# EAGLE board CAN_BUS_Interface_v2 (EAGLE 4.11)
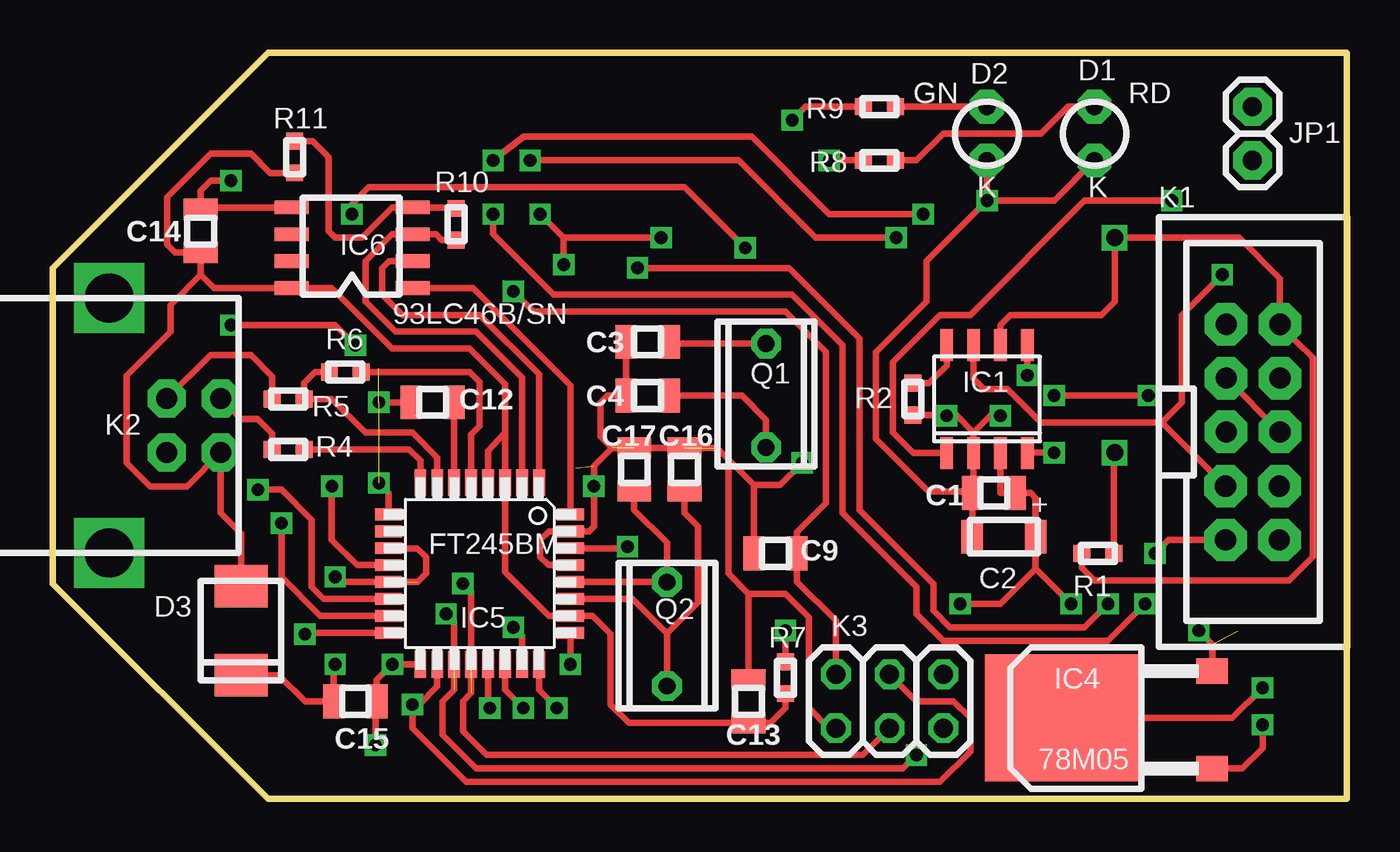
[diagram p0: board, top side]
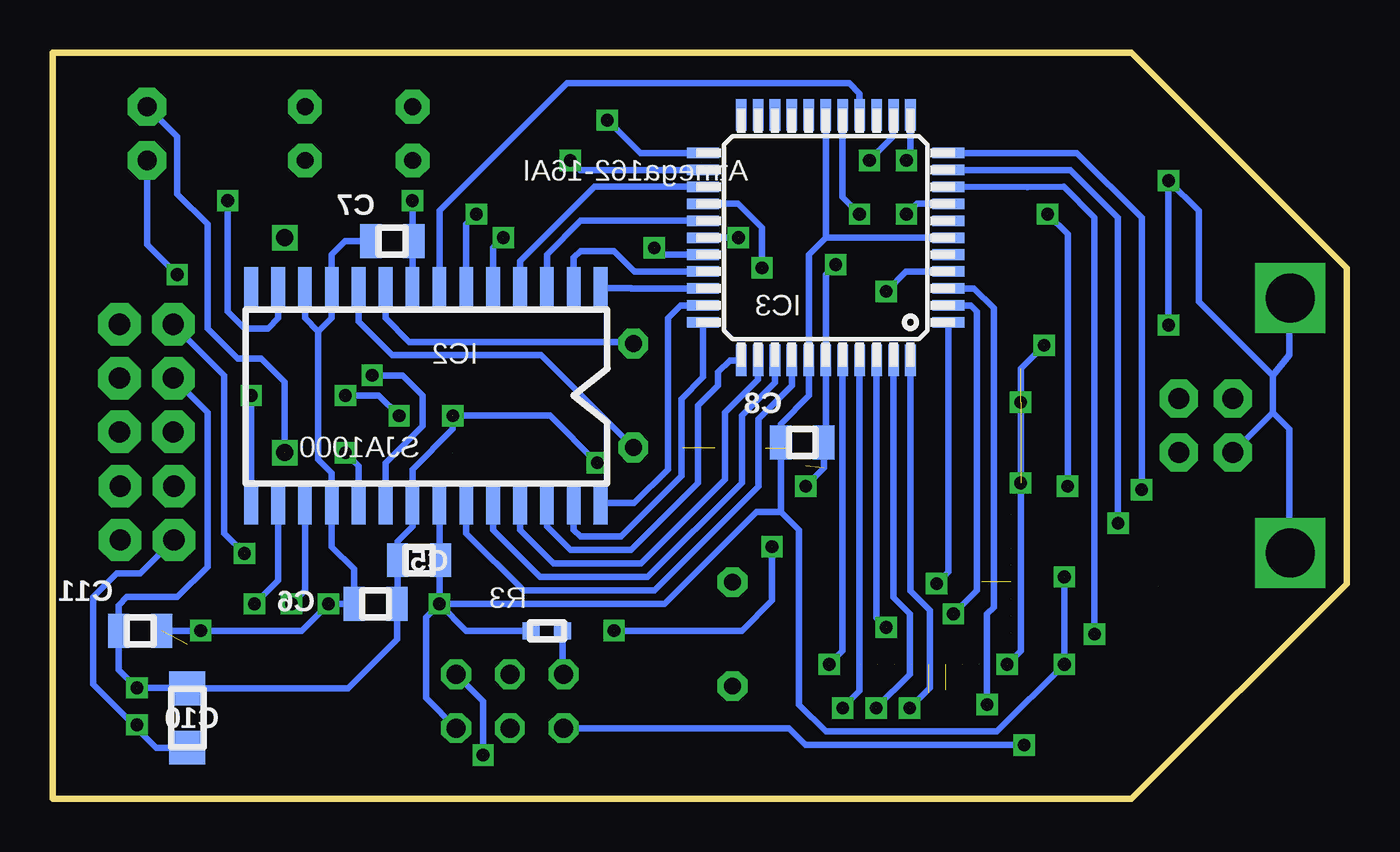
[diagram p1: board, bottom side, seen from below]

Size 61.12 x 35.24 mm. Coordinates in mm from the lower left corner, seen from the top.
Outline: 61.12,0 10.16,0 0,10.16 0,25.08 10.16,35.24 61.12,35.24 61.12,0
Copper layers (1*16): Top 0.035mm / dielectric 1.5mm / Bottom 0.035mm
Design rules "default": minimum track width 10mil, minimum drill 24mil, track to track 8mil, track to pad 8mil, pad to pad 8mil, via to via 8mil, smd to smd 8mil, copper to edge 40mil, drill to drill 8mil, minimum pad ring 10mil, minimum via ring 8mil, stop-mask expansion 4mil, vias tented up to drill 0mil, thermal gap 10mil

## Footprints (pad centres in the part's own frame; a part is rotated, then mirrored left to right if it is on the bottom)
C1 = smd 1 x 1.6: 1 -1.016,0; 2 1.016,0
C2 = smd 1 x 1.6: 1 1.5,0; 2 -1.5,0
C3 = smd 1 x 1.6: 1 1.016,0; 2 -1.016,0
C4 = smd 1 x 1.6: 1 1.016,0; 2 -1.016,0
C5 = smd 1 x 1.6 bottom: 1 -1.016,0; 2 1.016,0
C6 = smd 1 x 1.6 bottom: 1 1.016,0; 2 -1.016,0
C7 = smd 1 x 1.6 bottom: 1 1.016,0; 2 -1.016,0
C8 = smd 1 x 1.6 bottom: 1 1.016,0; 2 -1.016,0
C9 = smd 1 x 1.6: 1 1.016,0; 2 -1.016,0
C10 = smd 1.702 x 1.6 bottom: 1 0,-1.397; 2 0,1.397
C11 = smd 1 x 1.6 bottom: 1 -1.016,0; 2 1.016,0
C12 = smd 1 x 1.6: 1 1.016,0; 2 -1.016,0
C13 = smd 1.6 x 1: 1 0,-1.016; 2 0,1.016
C14 = smd 1.6 x 1: 1 0,1.016; 2 0,-1.016
C15 = smd 1 x 1.6: 1 1.016,0; 2 -1.016,0
C16 = smd 1.6 x 1: 1 0,-1.016; 2 0,1.016
C17 = smd 1.6 x 1: 1 0,-1.016; 2 0,1.016
D1 = drill 0.8 pad 1.6 octagon: 1 0,1.27; 2 0,-1.27
D2 = drill 0.8 pad 1.6 octagon: 1 0,1.27; 2 0,-1.27
D3 = smd 2.5 x 2: 1 0,2.1; 2 0,-2.1
IC1 = smd 0.6 x 1.5: 1 -1.905,-2.55; 2 -0.635,-2.55; 3 0.635,-2.55; 4 1.905,-2.55; 5 1.905,2.55; 6 0.635,2.55; 7 -0.635,2.55; 8 -1.905,2.55
IC2 = smd 0.65 x 2 bottom: 1 0,0; 2 1.27,0; 3 2.54,0; 4 3.81,0; 5 5.08,0; 6 6.35,0; 7 7.62,0; 8 8.89,0; 9 10.16,0; 10 11.43,0; 11 12.7,0; 12 13.97,0; 13 15.24,0; 14 16.51,0; 15 16.51,-10.16; 16 15.24,-10.16; 17 13.97,-10.16; 18 12.7,-10.16; 19 11.43,-10.16; 20 10.16,-10.16; 21 8.89,-10.16; 22 7.62,-10.16; 23 6.35,-10.16; 24 5.08,-10.16; 25 3.81,-10.16; 26 2.54,-10.16; 27 1.27,-10.16; 28 0,-10.16
IC3 = smd 1.5 x 0.5 bottom: 1 -5.8,-4; 2 -5.8,-3.2; 3 -5.8,-2.4; 4 -5.8,-1.6; 5 -5.8,-0.8; 6 -5.8,0; 7 -5.8,0.8; 8 -5.8,1.6; 9 -5.8,2.4; 10 -5.8,3.2; 11 -5.8,4; 23 5.8,4; 24 5.8,3.2; 25 5.8,2.4; 26 5.8,1.6; 27 5.8,0.8; 28 5.8,0; 29 5.8,-0.8; 30 5.8,-1.6; 31 5.8,-2.4; 32 5.8,-3.2; 33 5.8,-4 | smd 0.5 x 1.5 bottom: 12 -4,5.8; 13 -3.2,5.8; 14 -2.4,5.8; 15 -1.6,5.8; 16 -0.8,5.8; 17 0,5.8; 18 0.8,5.8; 19 1.6,5.8; 20 2.4,5.8; 21 3.2,5.8; 22 4,5.8; 34 4,-5.8; 35 3.2,-5.8; 36 2.4,-5.8; 37 1.6,-5.8; 38 0.8,-5.8; 39 0,-5.8; 40 -0.8,-5.8; 41 -1.6,-5.8; 42 -2.4,-5.8; 43 -3.2,-5.8; 44 -4,-5.8
IC4 = smd 1.5 x 1.2: 1 5.239,-2.381; 3 5.239,2.222 | smd 7.5 x 6: 4 -1.746,0
IC5 = smd 0.559 x 1.27: 1 2.8,4.293; 2 2,4.293; 3 1.2,4.293; 4 0.4,4.293; 5 -0.4,4.293; 6 -1.2,4.293; 7 -2,4.293; 8 -2.8,4.293; 17 -2.8,-4.293; 18 -2,-4.293; 19 -1.2,-4.293; 20 -0.4,-4.293; 21 0.4,-4.293; 22 1.2,-4.293; 23 2,-4.293; 24 2.8,-4.293 | smd 1.27 x 0.559: 9 -4.293,2.8; 10 -4.293,2; 11 -4.293,1.2; 12 -4.293,0.4; 13 -4.293,-0.4; 14 -4.293,-1.2; 15 -4.293,-2; 16 -4.293,-2.8; 25 4.293,-2.8; 26 4.293,-2; 27 4.293,-1.2; 28 4.293,-0.4; 29 4.293,0.4; 30 4.293,1.2; 31 4.293,2; 32 4.293,2.8
IC6 = smd 1.6 x 0.65: 1 0,0; 2 0,1.27; 3 0,2.54; 4 0,3.81; 5 -5.715,3.81; 6 -5.715,2.54; 7 -5.715,1.27; 8 -5.715,0
JP1 = drill 0.9 pad 1.8 octagon: 1 0,0; 2 0,2.54
K1 = drill 1 pad 2 octagon: 1 -1.241,5.109; 2 1.299,5.109; 3 -1.241,2.569; 4 1.299,2.569; 5 -1.241,0.029; 6 1.299,0.029; 7 -1.27,-2.54; 8 1.27,-2.54; 9 -1.27,-5.08; 10 1.27,-5.08
K2 = drill 1 pad 1.8 octagon: 1 9.19,-0.94; 2 9.19,1.6; 3 6.65,1.6; 4 6.65,-0.94
K3 = drill 0.9 pad 1.4 octagon: 1 0,0; 2 0,-2.54; 3 -2.54,0; 4 -2.54,-2.54; 5 -5.08,0; 6 -5.08,-2.54
Q1 = drill 0.8 pad 1.4 octagon: 1 0.039,2.46; 2 0.039,-2.453
Q2 = drill 0.8 pad 1.4 octagon: 1 -0.039,-2.46; 2 -0.039,2.453
R1 = smd 0.8 x 0.8: 1 -0.75,0; 2 0.75,0
R2 = smd 0.8 x 0.8: 1 0,-0.75; 2 0,0.75
R3 = smd 0.8 x 0.8 bottom: 1 0.75,0; 2 -0.75,0
R4 = smd 0.8 x 0.8: 1 -0.75,0; 2 0.75,0
R5 = smd 0.8 x 0.8: 1 -0.75,0; 2 0.75,0
R6 = smd 0.8 x 0.8: 1 -0.75,0; 2 0.75,0
R7 = smd 0.8 x 0.8: 1 0,-0.75; 2 0,0.75
R8 = smd 0.8 x 0.8: 1 -0.75,0; 2 0.75,0
R9 = smd 0.8 x 0.8: 1 -0.75,0; 2 0.75,0
R10 = smd 0.8 x 0.8: 1 0,0.75; 2 0,-0.75
R11 = smd 0.8 x 0.8: 1 0,0.75; 2 0,-0.75

## Placement (x,y rotation side)
C1  100n  [C1]  44.45,14.45 0 top
C2  1uF/5V  [C2]  44.93,12.38 0 top
C3  15p  [C3]  28.1,21.59 0 top
C4  15p  [C4]  28.1,19.05 0 top
C5  100n  [C5]  43.81,11.27 0 top
C6  100n  [C6]  45.88,9.21 0 top
C7  100n  [C7]  45.09,26.35 0 top
C8  100n  [C8]  25.72,16.83 0 top
C9  10n  [C9]  34.13,11.59 0 top
C10  10u  [C10]  54.77,3.81 0 top
C11  100n  [C11]  56.99,7.94 0 top
C12  33n  [C12]  17.94,18.73 0 top
C13  100n  [C13]  32.86,4.6 0 top
C14  100n  [C14]  6.99,26.83 0 top
C15  100n  [C15]  14.29,4.6 0 top
C16  27p  [C16]  29.84,15.56 0 top
C17  27p  [C17]  27.46,15.56 0 top
D1  LED_Red  [D1]  49.21,31.43 0 top
D2  LED_Green  [D2]  44.13,31.43 0 top
D3  MBRS130LTR  [D3]  8.89,7.94 0 top
IC1  PCA82C250  [IC1]  44.13,18.89 0 top
IC2  SJA1000  [IC2]  35.24,24.13 0 top
IC3  Atmega162-16AI  [IC3]  24.61,26.51 0 top
IC4  78M05  [IC4]  49.53,3.81 0 top
IC5  FT245BM  [IC5]  20.16,10.64 0 top
IC6  93LC46B/SN  [IC6]  16.99,24.13 0 top
JP1  K1x2  [JP1]  56.67,30.16 0 top
K1  CAN BUS  [K1]  56.67,17.3 0 top
K2  USB-B  [K2]  -1.27,17.3 0 top
K3  ISP  [K3]  42.07,5.87 0 top
Q1  16MHZ  [Q1]  33.66,19.05 0 top
Q2  6MHZ  [Q2]  29.05,7.78 0 top
R1  121  [R1]  49.37,11.59 0 top
R2  39k2  [R2]  40.64,18.89 0 top
R3  10k  [R3]  37.78,7.94 0 top
R4  27  [R4]  11.11,16.51 0 top
R5  27  [R5]  11.11,18.89 0 top
R6  1k5  [R6]  13.81,20.16 0 top
R7  470  [R7]  34.61,5.71 0 top
R8  520  [R8]  39.05,30.16 0 top
R9  520  [R9]  39.05,32.7 0 top
R10  2k2  [R10]  19.05,27.15 0 top
R11  10k  [R11]  11.43,30.32 0 top

## Library data of the parts
C1-C17 D1-D3 IC1-IC6 JP1 K1-K3 Q1 Q2 R1-R11 = CAN_BUS_Interface_v2

## Nets
1: IC6.4 R10.1 R11.1
2: JP1.2 R1.2
3V3OUT: C12.1 IC5.6
+5V: C1.2 C2.1 C5.1 C6.1 C7.1 C8.1 C11.1 C15.2 D3.2 IC1.3 IC2.11 IC2.12 IC2.18 IC2.22 IC3.6 IC3.17 IC3.38 IC4.3 IC5.11 IC5.13 K3.2 R3.1
AVR_CLK: IC2.7 IC3.15
CAN_ALE: IC2.3 IC3.27
CAN_CS: IC2.4 IC3.25
CAN_INT: IC2.16 IC3.8
CAN_RD: IC2.5 IC3.13
CAN_RST: IC2.17 IC3.26
CAN_VCC: C10.1 IC4.1 K1.1 K1.9
CAN_WR: IC2.6 IC3.12
CANH: IC1.7 JP1.1 K1.7
CANL: IC1.6 K1.2 R1.1
D0: IC3.40 IC5.25
D1: IC3.41 IC5.24
D2: IC3.42 IC5.23
D3: IC3.43 IC5.22
D4: IC3.44 IC5.21
D5: IC3.1 IC5.20 K3.4
D6: IC3.2 IC5.19 K3.1
D7: IC3.3 IC5.18 K3.3
DATA+: K2.3 R5.1
DATA-: K2.2 R4.1
EECS: IC5.32 IC6.1
EEDATA: IC5.2 IC6.3 R10.2
EESK: IC5.1 IC6.2
GND: C1.1 C2.2 C3.2 C4.2 C5.2 C6.2 C7.2 C8.2 C9.2 C10.2 C11.2 C12.2 C13.2 C14.1 C15.1 C16.2 C17.2 D1.2 D2.2 IC1.2 IC2.8 IC2.15 IC2.21 IC3.16 IC3.28 IC3.39 IC4.4 IC5.9 IC5.17 IC5.29 IC5.31 IC6.5 K1.3 K1.6 K2.4 K3.6 R2.1
LED1: IC3.23 R9.1
LED2: IC3.24 R8.1
PA0/AD0/PCINT0: IC2.23 IC3.37
PA1/AD1/PCINT1: IC2.24 IC3.36
PA2/AD2/PCINT2: IC2.25 IC3.35
PA3/AD3/PCINT3: IC2.26 IC3.34
PA4/AD4/PCINT4: IC2.27 IC3.33
PA5/AD5/PCINT5: IC2.28 IC3.32
PA6/AD6/PCINT6: IC2.1 IC3.31
PA7/AD7/PCINT7: IC2.2 IC3.30
RESET: C9.1 IC3.4 K3.5 R3.2
RS: IC1.8 R2.2
RSTOUT#: IC5.5 R6.2
RX0: IC1.4 IC2.19
RX1: IC1.5 IC2.20
SIG$49: IC5.30 R7.2
SIG$52: D2.1 R9.2
SIG$53: D1.1 R8.2
TX0: IC1.1 IC2.13
USB_RD: IC3.9 IC5.16
USB_RXF: IC3.29 IC5.12
USB_TXE: IC3.11 IC5.14
USB_VCC: C13.1 C14.2 D3.1 IC5.3 IC5.4 IC5.26 IC6.8 K2.1 R7.1 R11.2
USB_WR: IC3.10 IC5.15
USBDM: IC5.8 R4.2
USBDP: IC5.7 R5.2 R6.1
XTAL1: C3.1 IC2.9 Q1.1
XTAL2: C4.1 IC2.10 Q1.2
XTIN: C16.1 IC5.27 Q2.1
XTOUT: C17.1 IC5.28 Q2.2

## Tracks (layer width: path | path; a pad name or v marks a point on that pad's centre or on a via)
1
  Top 0.3: R10.1 19.01,27.94 IC6.4 16.03,27.94 14.61,26.51 13.34,26.51 13.02,26.83 13.02,30.32 12.27,31.07 R11.1
2  (via drill 0.8)  (1 unrouted)
  Top 0.3: v50.16,16.35 50.11,16.3 50.11,13.79 R1.2
  Bottom 0.3: v50.16,16.35 50.16,19.68 51.28,20.8 52.39,20.8 53.82,22.23 53.82,27.15 55.24,28.57 55.24,31.27 JP1.2
3V3OUT
  Top 0.3: IC5.6 C12.1
+5V  (via drill 0.6)  (7 unrouted)
  Top 0.3: IC1.3 44.77,14.45 C1.2 46.2,14.45 46.43,14.22 C2.1 46.43,10.88 | v42.86,9.21 44.77,9.21 46.43,10.87 46.43,10.88 | 46.43,10.88 v48.1,9.21 | v13.34,10.48 13.58,10.24 17.22,10.24 17.62,10.64 17.62,11.43 17.21,11.84 IC5.11 | v13.34,6.35 13.27,6.29 C15.2 11.91,4.6 10.67,5.84 D3.2 | IC4.3 54.77,7.3 v54.13,7.94
  Bottom 0.3: 48.58,22.07 48.58,16.03 47.94,15.4 IC2.18 47.94,11.91 46.9,10.86 C6.1 v48.1,9.21 49.37,7.94 v54.13,7.94 C11.1 | 48.58,22.07 47.94,22.7 IC2.11 47.94,25.72 47.31,26.35 C7.1 | 48.58,22.07 49.21,22.7 IC2.12 | 42.86,11.34 IC2.22 | v42.86,9.21 42.86,11.34 | 42.86,11.34 C5.1 | 24.61,26.51 IC3.6 | 24.61,26.51 IC3.17 | 24.61,26.51 25.4,25.72 IC3.38 25.41,19.04 26.73,17.72 C8.1 26.73,13.56 | v42.86,9.21 32.23,9.21 27.88,13.56 26.73,13.56 | 26.73,13.56 25.88,12.7 25.88,4.45 24.61,3.17 16.51,3.17 v13.34,6.35 v13.34,10.48 | R3.1 41.59,7.94 v42.86,9.21 | v42.86,9.21 43.5,8.57 43.5,4.76 K3.2
AVR_CLK
  Bottom 0.3: IC3.15 23.01,33.33 23.5,33.81 36.83,33.81 42.86,27.78 IC2.7
CAN_ALE
  Bottom 0.3: IC2.3 37.78,25.72 36.19,27.31 IC3.27
CAN_CS
  Bottom 0.3: IC2.4 39.05,25.4 35.54,28.91 IC3.25
CAN_INT  (via drill 0.6)  (2 unrouted)
  Top 0.3: v51.59,9.21 49.85,7.46 42.07,7.46 40.8,8.73 40.8,10 37.31,13.49 37.31,21.43 34.92,23.81 23.65,23.81 20.8,26.67 v20.8,27.62
  Bottom 0.3: IC2.16 50.48,10.32 v51.59,9.21 | IC3.8 20.31,28.11 v20.8,27.62
CAN_RD  (via drill 0.6)  (2 unrouted)
  Top 0.3: v22.54,30.16 32.38,30.16 36.04,26.51 v39.85,26.51
  Bottom 0.3: IC2.5 40.32,26.04 v39.85,26.51 | IC3.13 21.43,31.27 v22.54,30.16
CAN_RST  (via drill 0.6)  (2 unrouted)
  Top 0.3: v49.85,9.21 48.74,8.1 42.39,8.1 41.59,8.89 41.59,10.16 38.1,13.65 38.1,21.75 34.77,25.08 v27.62,25.08
  Bottom 0.3: IC3.26 28.75,28.11 27.62,26.99 v27.62,25.08 | IC2.17 49.21,9.84 v49.85,9.21
CAN_VCC  (via drill 0.6)  (2 unrouted)
  Top 0.3: v52.07,11.59 52.7,12.22 K1.9 | v57.15,3.49 57.15,2.38 56.2,1.43 IC4.1
  Bottom 0.3: C10.1 56.23,2.41 57.15,3.33 v57.15,3.49 57.31,3.49 59.21,5.4 59.21,9.53 58.1,10.64 56.99,10.64 K1.9 | K1.1 53.02,20 53.02,12.54 v52.07,11.59
CAN_WR  (via drill 0.6)  (2 unrouted)
  Top 0.3: v20.8,30.16 22.23,31.27 33.02,31.27 36.67,27.62 v41.12,27.62
  Bottom 0.3: IC2.6 41.59,27.15 v41.12,27.62 | IC3.12 20.61,30.35 v20.8,30.16
CANH  (via drill 0.6)  (1 unrouted)
  Top 0.3: IC1.7 43.5,19.84 43.97,19.37 45.09,19.37 46.67,17.78 52.39,17.78 | 52.39,17.78 K1.7 | 52.39,17.78 53.34,18.73 53.34,22.86 v55.24,24.77
  Bottom 0.3: v55.24,24.77 56.67,26.19 JP1.1
CANL  (via drill 0.8)
  Top 0.3: R1.1 48.62,10.91 49.21,10.32 58.42,10.32 59.53,11.43 59.53,20.86 57.97,22.35 K1.2 57.97,24.58 56.04,26.51 v50.16,26.51 50.16,23.5 49.53,22.86 45.24,22.86 44.77,22.38 IC1.6
D0  (via drill 0.6)  (1 unrouted)
  Top 0.3: IC5.25 v24.45,6.36 v24.45,6.35
  Bottom 0.3: IC3.40 23.81,6.99 v24.45,6.35
D1  (via drill 0.6)  (2 unrouted)
  Top 0.3: v23.81,4.29 22.96,5.14 IC5.24
  Bottom 0.3: IC3.41 23.01,5.09 v23.81,4.29
D2  (via drill 0.6)  (2 unrouted)
  Top 0.3: v21.75,8.1 22.16,7.68 IC5.23
  Bottom 0.3: IC3.42 22.21,8.55 v21.75,8.1
D3  (via drill 0.6)  (2 unrouted)
  Top 0.3: IC5.22 21.36,5.15 v22.23,4.29
  Bottom 0.3: IC3.43 21.41,9.5 20.64,8.73 20.64,5.87 v22.23,4.29
D4  (via drill 0.6)  (2 unrouted)
  Top 0.3: IC5.21 20.56,4.53 v20.64,4.29
  Bottom 0.3: IC3.44 20.61,9.81 19.68,8.89 19.68,5.24 v20.64,4.29
D5  (via drill 0.6)  (2 unrouted)
  Top 0.3: v19.37,10.16 19.76,9.77 19.76,5 19.37,4.6 19.37,3.17 20.48,2.06 38.26,2.06 K3.4
  Bottom 0.3: IC3.1 18.81,10.72 v19.37,10.16
D6  (via drill 0.6)  (3 unrouted)
  Top 0.3: v18.57,8.73 18.96,8.34 18.96,5.15 18.41,4.6 18.41,3.02 20,1.43 40.16,1.43 v40.8,2.06
  Bottom 0.3: IC3.2 17.75,23.31 17.46,23.02 17.46,9.84 v18.57,8.73 | K3.1 40.8,4.6 v40.8,2.06
D7  (via drill 0.6)  (2 unrouted)
  Top 0.3: IC5.18 18.16,5.3 17.3,4.45 v16.99,4.45 16.99,3.33 19.53,0.79 41.91,0.79 43.34,2.22 43.34,3.81 42.55,4.6 40.8,4.6 K3.3
  Bottom 0.3: IC3.3 17.6,24.11 16.67,23.18 16.67,9.05 16.99,8.73 v16.99,4.45
DATA+
  Top 0.3: R5.1 10.36,19.96 9.37,20.95 7.46,20.95 K2.3
DATA-
  Top 0.3: R4.1 10.36,17.26 9.68,17.94 8.89,17.94 K2.2
EECS
  Top 0.3: 24.4,13.49 IC5.32 24.45,19.52 19.84,24.13 IC6.1
EEDATA
  Top 0.3: IC5.2 22.16,19.91 20,22.07 16.19,22.07 14.76,23.5 14.76,25.4 16.03,26.67 IC6.3 18.1,26.67 18.37,26.4 R10.2
EESK
  Top 0.3: IC5.1 22.96,20.06 20.16,22.86 16.51,22.86 15.56,23.81 15.56,25.08 15.88,25.4 IC6.2
GND  (via drill 0.6, 2.3)  (22 unrouted)
  Top 0.3: K1.3 K1.6 | 43.5,14.51 IC1.2 43.5,17.3 | C2.2 C1.1 43.5,14.51 | v47.31,19.05 v51.75,19.05 | 43.5,17.3 44.29,18.1 v44.77,18.1 | 43.5,14.51 41.37,14.51 38.89,16.99 38.89,21.11 41.27,23.5 41.27,25.4 v44.13,28.26 | 43.5,17.3 42.7,18.1 v42.23,18.1 42.18,18.14 R2.1 | 24.13,26.51 v28.73,26.51 | 24.13,26.51 v23.02,27.62 | v24.13,25.24 24.13,26.51 | 26.42,16.57 25.56,15.72 v25.56,14.76 25.56,12.86 25.34,12.64 IC5.31 23.43,12.64 23.02,12.22 23.02,11.43 23.41,11.04 IC5.29 | 26.42,16.57 31.37,16.57 31.91,16.03 | v16.03,6.34 IC5.17 | v16.03,6.34 15.3,5.62 C15.1 15.24,4.54 v15.24,2.54 | v16.03,6.34 v16.03,6.35 | IC5.9 15.87,14.45 v15.4,14.92 | C12.2 v15.4,18.73 | K3.6 36.67,3.33 35.72,4.29 35.72,8.57 34.61,9.68 32.86,9.68 | C3.2 C4.2 26.19,19.05 25.88,18.73 25.88,17.11 26.42,16.57 | 31.91,16.03 31.91,10.64 32.86,9.68 | 32.86,9.68 C13.2 | 33.12,14.83 C9.2 | 31.91,16.03 33.12,14.83 | 33.12,14.83 34.35,14.83 v35.4,15.88 | v14.29,21.43 13.34,22.38 v8.41,22.38 | IC6.5 7.08,27.94 C14.1 6.99,28.73 7.46,29.21 v8.41,29.21 | v44.13,28.26 D2.2 | v44.13,28.26 47.31,28.26 D1.2 | v57.15,5.24 55.72,3.81 IC4.4
  Bottom 0.3: v47.31,19.05 45.72,19.05 v44.77,18.1 | IC2.8 44.13,26.29 | 44.13,26.29 v44.13,28.26 | 44.13,26.29 C7.2 | IC2.15 v51.75,19.05 | IC3.28 v28.73,26.51 | IC3.16 23.81,28.42 v23.02,27.62 | v24.13,25.24 24.61,24.77 IC3.39 24.61,16.92 C8.2 24.7,15.62 v25.56,14.76 | v16.03,6.35 15.4,6.99 v15.4,14.92 v15.4,18.73 15.4,20.32 v14.29,21.43 | K3.6 26.35,3.33 25.56,2.54 v15.24,2.54 | v35.4,15.88 37.62,18.1 v42.23,18.1 42.23,17.46 44.13,15.56 IC2.21 44.13,12.86 44.83,12.16 C5.2 44.83,9.24 C6.2 44.86,7.53 47.18,5.21 C10.2 54.8,5.24 v57.15,5.24 58.01,6.1 C11.2 58.01,9.14 57.63,9.53 55.24,9.53 53.82,10.95 53.82,18.26 K1.3 | 3.49,18.26 K2.4 | 3.49,18.26 3.49,20 | 3.49,20 6.99,23.5 6.99,27.78 v8.41,29.21 v8.41,22.38 | 3.49,20 2.7,20.95 2.7,23.65 v2.66,23.65 | 3.49,18.26 2.7,17.46 2.7,11.59 v2.66,11.61
LED1  (via drill 0.6)  (1 unrouted)
  Top 0.3: v34.92,32.07 35.56,32.7 R9.1
  Bottom 0.3: IC3.23 33.37,30.51 v34.92,32.07
LED2  (via drill 0.6)  (1 unrouted)
  Top 0.3: v36.67,30.16 R8.1
  Bottom 0.3: IC3.24 36.22,29.71 v36.67,30.16
PA0/AD0/PCINT0
  Bottom 0.3: IC2.23 41.59,12.54 38.89,9.84 32.7,9.84 27.78,14.76 27.78,17.94 26.21,19.51 IC3.37
PA1/AD1/PCINT1
  Bottom 0.3: IC2.24 40.32,12.7 38.1,10.48 33.02,10.48 28.57,14.92 28.57,18.1 27.01,19.67 IC3.36
PA2/AD2/PCINT2
  Bottom 0.3: IC2.25 39.05,12.7 37.47,11.11 33.34,11.11 29.37,15.08 29.37,18.26 27.81,19.82 IC3.35
PA3/AD3/PCINT3
  Bottom 0.3: IC2.26 37.78,12.86 36.67,11.75 33.81,11.75 30.64,14.92 30.64,18.57 29.69,19.53 29.69,20.16 29.14,20.71 IC3.34
PA4/AD4/PCINT4
  Bottom 0.3: IC2.27 36.51,12.7 36.2,12.38 34.29,12.38 31.43,15.24 31.43,18.89 30.41,19.92 IC3.33
PA5/AD5/PCINT5
  Bottom 0.3: IC2.28 33.66,13.97 32.07,15.56 32.07,22.7 31.46,23.31 IC3.32
PA6/AD6/PCINT6
  Bottom 0.3: IC2.1 33.81,24.13 33.8,24.11 IC3.31
PA7/AD7/PCINT7
  Bottom 0.3: IC2.2 36.51,25.56 36.2,25.88 34.61,25.88 33.64,24.91 IC3.30
RESET  (via drill 0.6)  (1 unrouted)
  Top 0.3: v21.75,23.97 22.7,23.02 34.61,23.02 36.51,21.11 36.51,13.97 35.15,12.61 C9.1 35.15,10.26 36.99,8.41 K3.5
  Bottom 0.3: IC3.4 20.81,24.91 v21.75,23.97 | R3.2 37.03,5.92 K3.5
RS  (1 unrouted)
  Top 0.3: IC1.8 42.23,20.48 41.39,19.64 R2.2
RSTOUT#
  Top 0.3: IC5.5 19.76,17.22 20.16,17.62 20.16,19.68 19.68,20.16 R6.2
RX0  (via drill 0.6)  (1 unrouted)
  Top 0.3: v47.31,16.35 IC1.4
  Bottom 0.3: IC2.19 46.67,15.72 v47.31,16.35
RX1  (via drill 0.6)  (1 unrouted)
  Top 0.3: v46.04,20 IC1.5
  Bottom 0.3: IC2.20 45.4,15.88 43.66,17.62 43.66,19.05 44.61,20 v46.04,20
SIG$49  (via drill 0.6)  (2 unrouted)
  Top 0.3: R7.2 v34.61,7.94 | IC5.30 27.08,11.84 v27.15,11.91
  Bottom 0.3: v27.15,11.91 27.15,9.37 28.57,7.94 v34.61,7.94
SIG$52
  Top 0.3: R9.2 D2.1
SIG$53
  Top 0.3: R8.2 40.8,30.16 42.07,31.43 46.67,31.43 47.94,32.7 D1.1
TX0  (via drill 0.6)  (2 unrouted)
  Top 0.3: v52.86,28.26 48.74,28.26 43.34,22.86 41.91,22.86 39.69,20.64 39.69,17.3 40.65,16.34 IC1.1
  Bottom 0.3: IC2.13 50.48,22.7 50.96,22.23 52.07,22.23 52.86,23.02 v52.86,28.26
USB_RD  (via drill 0.6)  (2 unrouted)
  Top 0.3: IC5.16 11.96,7.84 v11.91,7.78
  Bottom 0.3: v11.91,7.78 11.91,27.46 13.35,28.91 15.08,28.89 IC3.9
USB_RXF  (via drill 0.6)  (4 unrouted)
  Top 0.3: v32.7,26.04 29.84,28.89 14.92,28.89 14.13,28.1 v14.13,27.62 | IC5.12 14.36,11.04 13.18,12.22 v13.18,14.76
  Bottom 0.3: IC3.29 32.38,25.71 v32.7,26.04 | v13.18,14.76 13.18,26.67 v14.13,27.62
USB_TXE  (via drill 0.6)  (2 unrouted)
  Top 0.3: IC5.14 12.79,9.44 12.22,10 12.22,13.18 10.79,14.61 v9.68,14.61
  Bottom 0.3: IC3.11 12.73,30.51 9.68,27.46 v9.68,14.61
USB_VCC  (1 unrouted)
  Top 0.3: R7.1 34.61,4.29 33.91,3.59 C13.1 27.21,3.59 26.35,4.45 26.35,7.78 25.5,8.64 IC5.26 23.43,8.64 21.36,10.71 IC5.3 21.36,17.3 | IC5.4 20.56,16.43 21.36,17.3 | 21.36,17.3 21.36,19.6 19.68,21.27 16.03,21.27 13.18,24.13 IC6.8 7.62,24.13 6.99,24.77 | 6.99,24.77 C14.2 5.78,25.81 5.4,26.19 5.4,28.42 7.46,30.48 9.37,30.48 10.28,29.57 R11.2 | 6.99,24.77 5.56,23.34 5.56,22.07 3.49,20 3.49,15.88 4.6,14.76 6.35,14.76 K2.1 7.92,13.51 8.89,12.54 D3.1
USB_WR  (via drill 0.6)  (2 unrouted)
  Top 0.3: IC5.15 12.64,8.64 10.79,10.48 v10.79,13.02
  Bottom 0.3: IC3.10 13.04,29.71 10.79,27.46 v10.79,13.02
USBDM
  Top 0.3: IC5.8 17.36,15.98 16.83,16.51 R4.2
USBDP
  Top 0.3: IC5.7 18.16,16.13 16.99,17.3 14.76,17.3 13.18,18.89 R5.2 11.86,19.64 12.38,20.16 R6.1 13.13,20.09
XTAL1
  Top 0.3: C3.1 29.2,21.51 Q1.1
  Bottom 0.3: IC2.9 45.4,22.7 44.29,21.59 33.77,21.59 Q1.1
XTAL2
  Top 0.3: C4.1 32.54,19.05 33.69,17.9 Q1.2
  Bottom 0.3: IC2.10 46.67,22.54 45.09,20.95 38.05,20.95 Q1.2
XTIN
  Top 0.3: IC5.27 27.39,9.44 29.01,7.82 | 29.01,7.82 Q2.1 | 29.01,7.82 30.48,9.29 30.48,12.86 29.84,13.49 C16.1
XTOUT
  Top 0.3: IC5.28 Q2.2 | Q2.2 28.22,10.23 | C17.1 27.46,13.65 29.01,12.1 Q2.2

## Text on the board
tPlace: GN | RD | K | K